# Altium PCB Universal_Driver v2___.PcbDoc (part 2 of 2)
Units mm, origin at the board's own origin, x right, y up, seen from the top; angles counter-clockwise.
Board outline 105.6 x 112.5 mm, 2 copper layers (Top Layer, Bottom Layer); 161 components, 188 nets, 675 pads, 155 vias.
Unrouted connection lines stored in the file: 74.
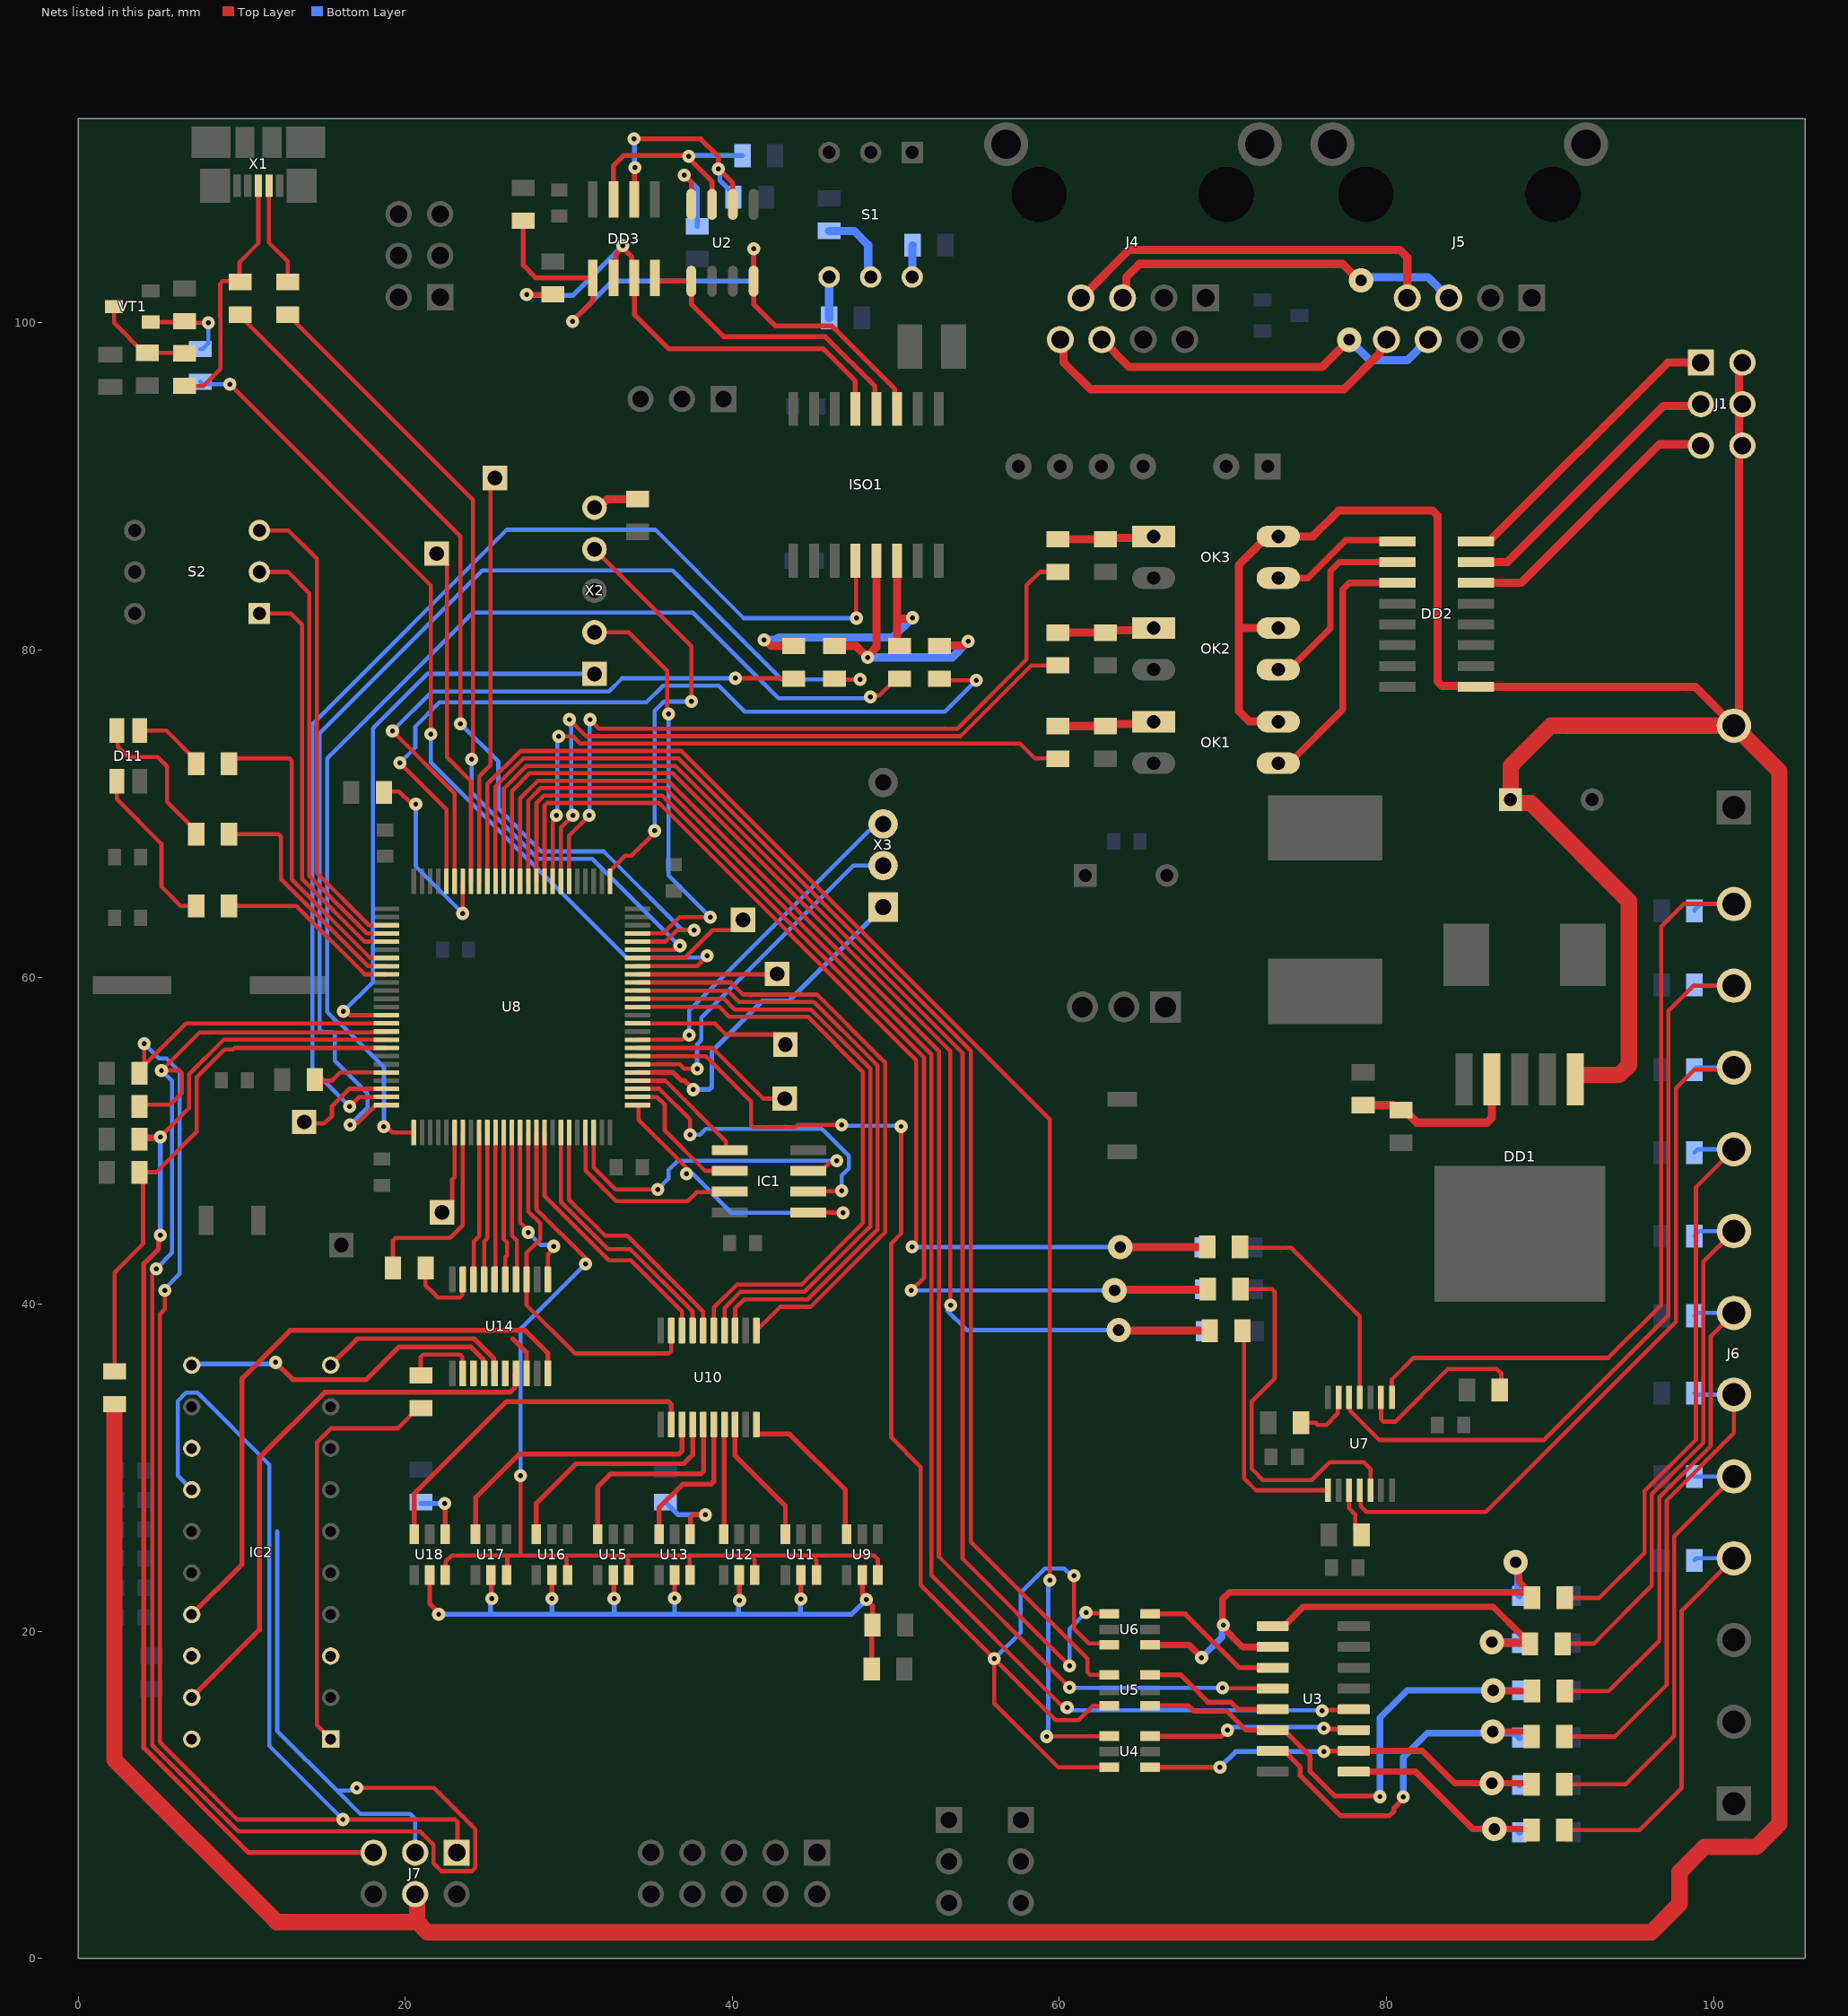
[diagram p2: the nets of this part, all layers, seen from the top]

## Via types
v1: diameter 0.8, hole 0.3, Top Layer to Bottom Layer, 122 vias
v2: diameter 1.5, hole 0.7, Top Layer to Bottom Layer, 29 vias
v3: diameter 4, hole 3.5, Top Layer to Bottom Layer, 4 vias

## Nets (pads, with @x,y where several pads share a name; then routed paths per layer and width w, separated by ;. In a path a pad name is that pad's centre, name@x,y a point inside that pad or via, vN(x,y) a via of type N, cw(c..) or ccw(c..) an arc to the next point about the centre after c; other vN are vias at no path point) (continued)
NetD5_1: D5.1 R37.2 U3.9 | length 14
  Top Layer w0.4: U3.9@78,11.43 81.77,11.43 85.275,7.925 v2(86.6,7.925) 88.8,7.925 R37.2@88.875,7.85
  Bottom Layer w0.4: v2(86.6,7.925) 87.94,7.925 D5.1@88.14,7.725
NetD6_1: D6.1 R38.2 U3.10 U4.1 | length 26.3
  Top Layer w0.3: U4.1@65.555,11.7 v1(69.825,11.7) ; v1(76.175,12.65) 76.2,12.675 77.975,12.675 U3.10@78,12.7
  Top Layer w0.4: U3.10@78,12.7 82.2,12.7 84.175,10.725 v2(86.45,10.725) 88.8,10.725 R38.2@88.875,10.65
  Bottom Layer w0.3: v1(69.825,11.7) 70.775,12.65 v1(76.175,12.65)
  Bottom Layer w0.4: v2(86.45,10.725) 88.03,10.725 D6.1@88.14,10.615
NetD7_1: D7.1 R39.2 U3.7 | length 23.3
  Top Layer w0.3: U3.7@73.05,12.7 73.735,12.7 74.73,11.705 74.73,11.196 77.201,8.725 80.175,8.725 80.458,9.008 80.458,9.2 81.025,9.767 v1(81.025,9.875)
  Top Layer w0.4: v2(86.5,13.875) 88.575,13.875 R39.2@88.875,13.575
  Bottom Layer w0.4: v1(81.025,9.875) 81.025,12.3 82.5,13.775 87.885,13.775 88.14,13.52 D7.1@88.14,13.505
NetD8_1: D8.1 R40.2 U3.6 U5.1 | length 33.3
  Top Layer w0.3: U5.1@65.555,15.45 67.897,15.45 68.223,15.125 70.25,15.125 71.405,13.97 U3.6@73.05,13.97 73.735,13.97 75.33,12.375 75.33,11.445 76.825,9.95 79.55,9.95 v1(79.6,9.9)
  Top Layer w0.4: v2(86.525,16.395) 86.57,16.35 R40.2@88.9,16.35
  Bottom Layer w0.4: v1(79.6,9.9) 79.6,14.725 81.27,16.395 v2(86.525,16.395) D8.1@88.14,16.395
NetD9_1: D9.1 R41.2 U3.1 | length 21.3
  Top Layer w0.4: U3.1@73.05,20.32 73.735,20.32 74.915,21.5 86.525,21.5 88.325,19.7 88.525,19.7 88.775,19.45 R41.2@88.775,19.25
  Top Layer w0.5: v2(86.45,19.35) 86.5,19.3 88.725,19.3 R41.2@88.775,19.25
  Bottom Layer w0.5: v2(86.45,19.35) 86.483,19.317 88.107,19.317 D9.1@88.14,19.285
NetD10_1: D10.1 R42.2 U3.2 U6.1 | length 35.1
  Top Layer w0.4: U6.1@65.555,19.175 67.925,19.175 v1(68.7,18.4) ; v1@69.975,20.275 71.2,19.05 U3.2@73.05,19.05 ; v1@69.975,20.4 69.975,21.975 70.4,22.4 88.6,22.4 R42.2@88.9,22.1 ; v2(87.9,24.225) 88.11,24.015 88.11,23.04 88.9,22.25 R42.2@88.9,22.1 ; R42.2@88.9,22.05 R42.2@88.9,22.1
  Bottom Layer w0.4: v1(68.7,18.4) 69.948,19.648 69.948,20.323 v1(70.025,20.4) ; v2(87.9,24.225) 88.02,24.105 88.02,22.295 D10.1@88.14,22.175
NetD11_2: D11.2 R49.2 | length 10.2
  Top Layer w0.254: D11.2@2.375,71.975 2.375,70.875 5.1,68.15 5.1,65.525 6.275,64.35 R49.2@7.225,64.35
NetD11_3: D11.3 R47.2 | length 4.4
  Top Layer w0.254: D11.3@3.775,75.075 5.4,75.075 7.225,73.25 R47.2@7.225,73.05
NetD11_4: D11.4 R48.2 | length 9.4
  Top Layer w0.254: D11.4@2.375,75.075 2.434,75.016 2.434,74.093 3.076,73.45 4.875,73.45 5.45,72.875 5.45,70.713 7.225,68.937 R48.2@7.225,68.738
NetD12_1: D12.1 R44.2 U8.88 | length 77.5
  Top Layer w0.254: U8.88@26.525,65.855 26.525,71.381 27.61,72.466 36.343,72.466 53.325,55.484 53.325,39.985 v1(53.356,39.954)
  Top Layer w0.5: v2(63.625,38.425) 63.652,38.399 69.173,38.399 R44.2@69.2,38.372
  Bottom Layer w0.254: v1(53.356,39.954) 53.356,39.806 53.175,39.626 53.175,39.595 54.345,38.425 v2(63.625,38.425) 68.725,38.425 D12.1@68.8,38.35
NetD13_1: D13.1 R45.2 U8.85 | length 73.4
  Top Layer w0.254: U8.85@28.025,65.855 28.025,70.643 28.486,71.104 35.713,71.104 51.727,55.09 51.727,41.627 v1(50.95,40.85)
  Top Layer w0.5: v2(63.375,40.85) 63.418,40.893 69.032,40.893 R45.2@69.075,40.936
  Bottom Layer w0.254: v1(50.95,40.85) v2(63.375,40.85) 68.676,40.85 D13.1@68.74,40.914
NetD14_1: D14.1 R46.2 U8.84 | length 68.5
  Top Layer w0.254: U8.84@28.525,65.855 28.525,70.501 28.674,70.65 35.525,70.65 51.25,54.925 51.25,43.898 51,43.648 v1(51,43.5)
  Top Layer w0.5: v2(63.725,43.5) R46.2@69.05,43.5
  Bottom Layer w0.254: v1(51,43.5) v2(63.725,43.5) 68.693,43.5 D14.1@68.715,43.478
NetDD1_4: DD1.4 R1.1 R5.1 | length 10.8
  Top Layer w0.5: R1.1@78.575,52.175 80.4,52.175 80.7,51.875 81.1,51.875 81.868,51.107 86.157,51.107 86.45,51.4 DD1.4@86.45,53.75
NetDD2_1: DD2.1 OK3.3 | length 8.3
  Top Layer w0.4: OK3.3@73.385,84.405 75.205,84.405 77.525,86.725 80.595,86.725 DD2.1@80.675,86.645
NetDD2_2: DD2.2 OK2.3 | length 12.1
  Top Layer w0.4: OK2.3@73.385,78.805 74.045,78.805 76.575,81.335 76.575,84.825 77.125,85.375 DD2.2@80.675,85.375
NetDD2_3: DD2.3 OK1.3 | length 16.2
  Top Layer w0.4: OK1.3@73.385,73.08 74.045,73.08 77.325,76.36 77.325,83.7 77.73,84.105 DD2.3@80.675,84.105
NetDD3_1: DD3.1 ISO1.11 R23.2 U2.4 | length 39.9
  Top Layer w0.3: R23.2@27.225,106.25 27.225,103.525 28,102.75 DD3.1@31.47,102.75 31.47,101.345 v1(30.225,100.1) ; v1(41.325,104.525) 41.315,104.515 41.315,102.56 U2.4@41.305,102.55 41.305,101.15 42.648,99.807 46.093,99.807 49.937,95.963 49.937,94.883 ISO1.11@50.08,94.74
  Bottom Layer w0.3: v1(30.225,100.1) 32.675,102.55 41.149,102.55 41.325,102.726 v1(41.325,104.525)
NetDD3_2: DD3.2 DD3.3 ISO1.13 R22.1 | length 32.1
  Top Layer w0.3: v1(27.426,101.726) 29.001,101.726 R22.1@29.025,101.75 ; DD3.2@32.74,102.75 32.89,102.9 32.89,104.18 33.3,104.59 33.86,104.03 33.86,102.9 DD3.3@34.01,102.75 34.01,100.515 36.1,98.425 45.55,98.425 47.525,96.45 47.525,94.755 ISO1.13@47.54,94.74
  Bottom Layer w0.3: v1(27.426,101.726) 27.477,101.675 30.25,101.675 v1(33.3,104.725)
NetDD3_4: DD3.4 ISO1.12 U2.1 | length 18.5
  Top Layer w0.3: DD3.4@35.28,102.75 35.28,102.7 35.43,102.55 U2.1@37.495,102.55 37.495,101.15 39.495,99.15 45.7,99.15 48.725,96.125 48.725,94.825 ISO1.12@48.81,94.74
NetDD3_6: DD3.6 R11.2 U2.6 | length 14.7
  Top Layer w0.3: v1(34,111.25) 38.075,111.25 39.15,110.175 v1(39.15,109.425) 40.035,108.54 U2.6@40.035,107.25 ; DD3.6@34.01,107.55 34.03,107.57 34.03,109.48 v1(34.05,109.5)
  Bottom Layer w0.3: v1(34,111.25) 34.025,111.225 34.025,109.525 v1(34.05,109.5) ; v1(39.15,109.425) 39.246,109.329 39.246,108.729 40.075,107.9 R11.2@40.075,107.7
NetDD3_7: DD3.7 R10.2 U2.7 | length 13.8
  Top Layer w0.3: DD3.7@32.74,107.55 32.74,109.615 33.375,110.25 37.264,110.25 v1(37.332,110.182) ; v1@37.4,110.25 37.496,110.154 37.496,109.919 38.765,108.65 U2.7@38.765,107.25
  Bottom Layer w0.3: v1(37.332,110.182) 37.4,110.25 40.6,110.25 R10.2@40.625,110.225
NetIC1_1: IC1.1 U8.51 | length 18.2
  Top Layer w0.254: U8.51@34.205,52.175 34.262,52.175 34.275,52.162 34.275,51.275 37.2,48.35 v1(37.2,47.975) ; IC1.1@44.65,45.62 44.66,45.61 46.765,45.61 v1(46.775,45.6)
  Bottom Layer w0.254: v1(37.2,47.975) 37.575,47.975 39.95,45.6 v1(46.775,45.6)
NetIC1_2: IC1.2 U8.53 | length 19.8
  Top Layer w0.254: U8.53@34.205,53.175 35.542,53.175 37.425,51.292 v1(37.425,50.375) ; IC1.2@44.65,46.89 44.68,46.92 46.67,46.92 v1(46.7,46.95)
  Bottom Layer w0.254: v1(37.425,50.375) 38.028,50.375 38.378,50.725 45.478,50.725 47.127,49.076 47.127,48.3 46.7,47.873 v1(46.7,46.95)
NetIC1_3: IC1.3 U8.48 | length 20.6
  Top Layer w0.254: U8.48@31.525,50.495 31.525,48.375 32.873,47.027 v1(35.45,47.027) ; IC1.3@44.65,48.16 45.45,48.16 45.961,48.671 46.296,48.671 v1(46.4,48.775)
  Bottom Layer w0.254: v1(35.45,47.027) 36.115,47.692 36.115,48.215 36.675,48.775 v1(46.4,48.775)
NetIC1_5: IC1.5 U8.54 | length 7.6
  Top Layer w0.254: U8.54@34.205,53.675 35.9,53.675 39.613,49.962 39.613,49.603 39.786,49.43 IC1.5@39.85,49.43
NetIC1_6: IC1.6 U8.52 | length 8.4
  Top Layer w0.254: U8.52@34.205,52.675 35.4,52.675 35.875,52.2 35.875,50.625 38.34,48.16 IC1.6@39.85,48.16
NetIC1_7: IC1.7 U8.47 | length 12.2
  Top Layer w0.254: U8.47@31.025,50.495 31.025,48.167 32.892,46.3 37.275,46.3 37.825,46.85 39.81,46.85 IC1.7@39.85,46.89
NetIC2_1: IC2.1 R60.1 | length 25.7
  Top Layer w0.254: IC2.1@15.45,13.415 14.593,14.272 14.593,31.55 15.457,32.413 19.538,32.413 20.775,33.65 R60.1@20.975,33.65
NetIC2_3: IC2.3 U14.13 | length 0.7
  Top Layer w0.3: U14.13@24.175,35.115 U14.13@24.175,35.78
NetIC2_10: IC2.10 U14.15 | length 12.1
  Top Layer w0.3: IC2.10@15.45,36.275 17.077,37.902 24.215,37.902 25.42,36.697 25.42,35.835 U14.15@25.475,35.78
NetIC2_11: IC2.11 U14.14 | length 20.4
  Top Layer w0.3: v1(12.075,36.45) 13.13,35.395 17.633,35.395 19.64,37.402 24.008,37.402 24.77,36.64 24.77,35.835 U14.14@24.825,35.78
  Bottom Layer w0.3: IC2.11@6.95,36.275 7.037,36.363 11.987,36.363 v1(12.075,36.45)
NetIC2_17: IC2.17 U14.20 | length 37.4
  Top Layer w0.3: IC2.17@6.95,21.035 10.031,24.116 10.031,35.467 12.966,38.402 27.338,38.402 28.725,37.015 U14.20@28.725,35.78
NetIC2_18: IC2.18 U14.18 | length 2.5
  Top Layer w0.3: 26.587,37.902 27.425,37.064 U14.18@27.425,35.78
NetIC2_19: IC2.19 U14.17 | length 34.7
  Top Layer w0.3: IC2.19@6.95,15.955 11.09,20.095 11.09,30.62 15.085,34.615 26.415,34.615 26.72,34.92 26.72,35.725 U14.17@26.775,35.78
NetIC2_20: IC2.20 U14.16 | length 0.7
  Top Layer w0.3: U14.16@26.125,35.115 U14.16@26.125,35.78
NetISO1_4: ISO1.4 U8.24 | length 70.8
  Top Layer w0.254: v1(16.6,52.1) 17.175,52.675 U8.24@18.845,52.675 ; ISO1.4@47.54,85.46 47.57,85.43 47.57,81.98 v1(47.6,81.95)
  Bottom Layer w0.254: v1(16.6,52.1) 14.321,54.379 14.321,75.471 26.2,87.35 35.3,87.35 40.7,81.95 v1(47.6,81.95)
NetISO1_5: ISO1.5 R25.2 R27.2 | length 16.9
  Top Layer w0.5: R27.2@46.25,80.25 47.575,80.25 v1(48.275,79.55) 48.275,79.631 48.81,80.166 ISO1.5@48.81,85.46 ; R25.2@52.675,80.25 52.7,80.275 54.094,80.275 54.344,80.525 v1(54.425,80.525)
  Bottom Layer w0.5: v1(48.275,79.55) 53.45,79.55 v1(54.425,80.525)
NetISO1_6: ISO1.6 R24.2 R26.1 | length 17.9
  Top Layer w0.5: v1(41.95,80.625) 42.006,80.625 42.381,80.25 R24.2@43.75,80.25 ; ISO1.6@50.08,85.46 50.08,81.83 ; R26.1@50.225,80.25 50.08,80.395 50.08,81.83 ; v1(51.025,81.975) 50.968,81.918 50.168,81.918 50.08,81.83
  Bottom Layer w0.5: v1(41.95,80.625) 42.683,80.625 42.833,80.775 49.825,80.775 v1(51.025,81.975)
NetJ4_5: J4.5 J5.5 | length 22.4
  Top Layer w0.5: J4.5@63.865,101.525 64.085,101.745 64.085,102.792 64.893,103.6 77.329,103.6 78.329,102.6 v2(78.45,102.6)
  Bottom Layer w0.5: v2(78.45,102.6) 78.721,102.6 78.921,102.8 82.54,102.8 J5.5@83.815,101.525
NetJ4_6: J4.6 J5.6 | length 22.4
  Top Layer w0.5: J4.6@62.595,98.985 64.28,97.3 76.05,97.3 v2(77.725,98.975)
  Bottom Layer w0.5: v2(77.725,98.975) 78.99,97.71 81.27,97.71 J5.6@82.545,98.985
NetJ4_7: J4.7 J5.7 | length 23.8
  Top Layer w0.5: J4.7@61.325,101.525 64.275,104.475 80.8,104.475 81.275,104 J5.7@81.275,101.525
NetJ4_8: J4.8 J5.8 | length 23.4
  Top Layer w0.5: J4.8@60.055,98.985 60.25,98.79 60.25,97.6 61.9,95.95 77.4,95.95 79.606,98.156 79.606,98.275 80.005,98.674 J5.8@80.005,98.985
NetJ6_4: J6.4 R28.1 R37.1 | length 26.1
  Top Layer w0.254: R37.1@90.875,7.85 95.475,7.85 98.05,10.425 98.05,21.275 J6.4@101.25,24.475
  Bottom Layer w0.254: R28.1@98.825,24.35 98.95,24.475 J6.4@101.25,24.475
NetJ6_5: J6.5 R29.1 R38.1 | length 27.7
  Top Layer w0.254: R38.1@90.875,10.65 94.625,10.65 97.596,13.621 97.596,25.821 J6.5@101.25,29.475
  Bottom Layer w0.254: R29.1@98.825,29.475 J6.5@101.25,29.475
NetJ6_6: J6.6 R30.1 R39.1 | length 29.5
  Top Layer w0.254: R39.1@90.875,13.575 93.975,13.575 97.142,16.742 97.142,28.016 101.25,32.124 J6.6@101.25,34.475
  Bottom Layer w0.254: R30.1@98.825,34.575 98.925,34.475 J6.6@101.25,34.475
NetJ6_7: J6.7 R31.1 R40.1 | length 31.5
  Top Layer w0.254: R40.1@90.9,16.35 93.6,16.35 96.688,19.438 96.688,28.204 99.833,31.349 99.833,38.058 J6.7@101.25,39.475
  Bottom Layer w0.254: R31.1@98.825,39.3 99,39.475 J6.7@101.25,39.475
NetJ6_8: J6.8 R32.1 R41.1 | length 33.2
  Top Layer w0.254: R41.1@90.775,19.25 92.692,19.25 96.234,22.792 96.234,28.392 99.379,31.537 99.379,42.604 J6.8@101.25,44.475
  Bottom Layer w0.254: R32.1@98.825,44.175 99.125,44.475 J6.8@101.25,44.475
NetJ6_9: J6.9 R33.1 R42.1 | length 35.5
  Top Layer w0.254: R42.1@90.9,22.05 93.025,22.05 95.78,24.805 95.78,28.58 98.925,31.725 98.925,47.15 J6.9@101.25,49.475
  Bottom Layer w0.254: R33.1@98.825,49.275 99.025,49.475 J6.9@101.25,49.475
NetJ6_10: J6.10 R34.1 U7.11 | length 46.1
  Top Layer w0.254: U7.11@78.375,28.63 78.426,28.579 78.426,27.649 78.775,27.3 86.075,27.3 97.7,38.925 97.7,53.225 98.825,54.35 101.125,54.35 J6.10@101.25,54.475
  Bottom Layer w0.254: R34.1@98.825,54.35 98.95,54.475 J6.10@101.25,54.475
NetJ6_11: J6.11 R35.1 U7.5 | length 49.9
  Top Layer w0.254: U7.5@77.715,34.32 77.765,34.269 77.765,33.5 79.566,31.7 89.625,31.7 97.246,39.321 97.246,57.946 98.775,59.475 J6.11@101.25,59.475
  Bottom Layer w0.254: R35.1@98.825,59.525 98.875,59.475 J6.11@101.25,59.475
NetJ6_12: J6.12 R36.1 U7.1 | length 50.2
  Top Layer w0.254: U7.1@80.331,34.32 80.331,35.406 81.65,36.725 93.575,36.725 96.792,39.942 96.792,63.092 98.175,64.475 J6.12@101.25,64.475
  Bottom Layer w0.254: R36.1@98.825,64.05 98.825,64.102 99.198,64.475 J6.12@101.25,64.475
NetOK1_1: OK1.1 R7.2 R8.1 | length 6
  Top Layer w0.5: R7.2@59.9,75.35 R8.1@62.825,75.35 62.96,75.485 65.63,75.485 OK1.1@65.765,75.62
NetOK2_1: OK2.1 R13.2 R14.1 | length 6
  Top Layer w0.5: R13.2@59.9,81.063 R14.1@62.825,81.062 62.966,81.204 65.624,81.204 OK2.1@65.765,81.345
NetOK3_1: OK3.1 R17.2 R18.1 | length 5.9
  Top Layer w0.5: R17.2@59.9,86.775 R18.1@62.825,86.775 62.91,86.86 65.68,86.86 OK3.1@65.765,86.945
NetR3_1: R3.1 S1.1B | length 2
  Bottom Layer w0.5: S1.1B@51.005,102.805 51.015,102.815 51.015,104.74 R3.1@51.025,104.75
NetR4_1: R4.1 S1.3B | length 2.5
  Bottom Layer w0.5: R4.1@45.925,100.3 S1.3B@45.925,102.805
NetR6_2: R6.2 U2.8 | length 5.4
  Top Layer w0.3: v1(37.075,109.025) 37.495,108.605 U2.8@37.495,107.25
  Bottom Layer w0.3: v1(37.075,109.025) 37.85,108.25 R6.2@37.85,105.9
NetR9_1: R9.1 S1.2B | length 4.8
  Bottom Layer w0.5: R9.1@45.925,105.625 47.45,105.625 48.31,104.765 48.31,102.96 S1.2B@48.465,102.805
NetR12_2: R12.2 X1.2 | length 6.4
  Top Layer w0.254: X1.2@11.675,108.39 11.675,104.905 12.825,103.755 R12.2@12.825,102.5
NetR15_2: R15.2 R16.1 X1.3 | length 15.4
  Top Layer w0.254: R16.1@6.5,96.15 7.675,96.15 8.702,97.177 8.702,100.301 8.695,100.308 8.695,102.401 8.844,102.55 9.875,102.55 9.875,103.725 11.025,104.875 X1.3@11.025,108.39
NetR16_2: R16.2 R20.2 VT1.3 | length 6.1
  Top Layer w0.254: VT1.3@2.2,101 2.2,100 4.025,98.175 R20.2@4.225,98.175 6.475,98.175 R16.2@6.5,98.15
NetR19_1: R19.1 R21.2 VT1.1 | length 5.5
  Top Layer w0.254: VT1.1@4.45,100.05 6.45,100.05 R19.1@6.5,100.1 6.6,100 v1(7.975,100)
  Bottom Layer w0.254: R21.2@7.475,98.4 7.602,98.4 7.975,98.773 v1(7.975,100)
NetR24_1: R24.1 U8.95 | length 36.7
  Top Layer w0.254: v1(19.225,75.05) 23.025,71.25 U8.95@23.025,65.855 ; v1(40.2,78.275) 43.497,78.275 43.636,78.136 R24.1@43.75,78.25
  Bottom Layer w0.254: v1(19.225,75.05) 21.643,77.468 32.46,77.468 33.267,78.275 v1(40.2,78.275)
NetR25_1: R25.1 U8.96 | length 50.1
  Top Layer w0.254: v1(19.675,73.1) 22.525,70.25 U8.96@22.525,65.855 ; R25.1@52.675,78.25 52.775,78.15 v1(54.925,78.15)
  Bottom Layer w0.254: v1(19.675,73.1) 20.623,74.048 20.623,75.323 22.096,76.796 34.746,76.796 35.771,77.821 39.179,77.821 40.775,76.225 53,76.225 v1(54.925,78.15)
NetR26_2: R26.2 U8.26 | length 67.4
  Top Layer w0.254: v1(18.7,50.85) 18.848,50.85 19.203,50.495 U8.26@20.525,50.495 ; v1(48.45,77.125) 48.554,77.229 49.004,77.229 50.025,78.25 R26.2@50.225,78.25
  Bottom Layer w0.254: v1(18.7,50.85) 18.7,54.5 16.025,57.175 15.924,57.175 15.229,57.87 15.229,73.379 24.15,82.3 25.05,82.3 37.575,82.3 42.825,77.05 48.375,77.05 v1(48.45,77.125)
NetR27_1: R27.1 U8.25 | length 70.2
  Top Layer w0.254: v1(16.625,50.975) 16.729,51.079 17.109,51.079 18.205,52.175 U8.25@18.845,52.175 ; R27.1@46.25,78.25 46.3,78.2 v1(47.825,78.2)
  Bottom Layer w0.254: v1(16.625,50.975) 17.7,52.05 17.7,52.9 15.704,54.896 15.704,56.501 15.555,56.65 14.924,56.65 14.775,56.799 14.775,74.925 24.725,84.875 36.35,84.875 43.025,78.2 v1(47.825,78.2)
NetR43_1: R43.1 U8.94 | length 12.1
  Top Layer w0.254: R43.1@18.7,71.3 18.75,71.35 19.633,71.35 20.303,70.679 20.546,70.679 v1(20.65,70.575) ; v1(23.525,63.9) U8.94@23.525,65.855
  Bottom Layer w0.254: v1(20.65,70.575) 20.65,66.775 v1(23.525,63.9)
NetR44_1: R44.1 U7.8 | length 14.5
  Top Layer w0.254: R44.1@71.2,38.372 71.3,38.272 71.3,29.35 72.02,28.63 U7.8@76.419,28.63
NetR45_1: R45.1 U7.12 | length 23.1
  Top Layer w0.254: R45.1@71.075,40.936 72.989,40.936 73.175,40.75 73.175,35.471 71.754,34.05 71.754,29.946 72.45,29.25 75.425,29.25 76.525,30.35 78.625,30.35 79.035,29.94 U7.12@79.035,28.63
NetR46_1: R46.1 U7.4 | length 14
  Top Layer w0.254: R46.1@71.05,43.5 71.1,43.45 74.175,43.45 78.375,39.25 U7.4@78.375,34.32
NetR47_1: R47.1 U8.7 | length 19.1
  Top Layer w0.254: R47.1@9.225,73.05 9.55,73.375 12.926,73.375 13.075,73.226 13.075,65.967 17.854,61.188 18.832,61.188 U8.7@18.845,61.175
NetR48_1: R48.1 U8.8 | length 14.5
  Top Layer w0.254: R48.1@9.225,68.738 12.237,68.738 12.4,68.575 12.4,66 17.725,60.675 U8.8@18.845,60.675
NetR49_1: R49.1 U8.9 | length 11.3
  Top Layer w0.254: R49.1@9.225,64.35 13.35,64.35 17.525,60.175 U8.9@18.845,60.175
NetR50_2: R50.2 U7.2 | length 11.3
  Top Layer w0.254: U7.2@79.67,34.32 79.67,32.974 79.819,32.825 80.533,32.825 83.758,36.05 86.725,36.05 87.025,35.75 87.025,34.85 R50.2@86.925,34.75
NetR51_2: R51.2 U7.6 | length 3.6
  Top Layer w0.254: R51.2@74.775,32.75 75.679,32.75 75.799,32.63 76.33,32.63 77.029,33.329 77.029,34.269 U7.6@77.08,34.32
NetR52_2: R52.2 U7.10 | length 3
  Top Layer w0.254: U7.10@77.715,28.63 77.715,27.535 78.102,27.148 78.102,26.273 R52.2@78.475,25.9
NetR57_1: R57.1 U8.21 | length 4.6
  Top Layer w0.254: R57.1@14.475,53.75 14.55,53.675 15.525,53.675 16.025,54.175 U8.21@18.845,54.175
NetR58_2: R58.2 U13.1 | length 4.7
  Top Layer w0.3: U13.1@37.425,25.95 37.437,25.962 37.437,26.949 37.613,27.125 v1(38.35,27.125)
  Bottom Layer w0.3: R58.2@35.925,27.9 36.7,27.125 v1(38.35,27.125)
NetR59_1: R59.1 U14.9 | length 4.7
  Top Layer w0.254: R59.1@21.25,42.225 21.25,41.15 21.724,40.676 21.992,40.408 23.34,40.408 23.493,40.561 23.493,41.488 U14.9@23.525,41.52
NetR59_2: R59.2 U8.32 | length 12
  Top Layer w0.254: R59.2@19.25,42.225 19.25,43.901 19.399,44.05 22.737,44.05 23.525,44.838 U8.32@23.525,50.495
NetR60_2: R60.2 U14.12 | length 4.8
  Top Layer w0.254: R60.2@20.975,35.65 20.95,35.675 20.95,36.776 21.099,36.925 23.343,36.925 23.491,36.776 23.491,35.814 U14.12@23.525,35.78
NetR62_2: R62.2 U18.1 | length 3.3
  Top Layer w0.3: v1(22.425,27.825) 22.438,27.812 22.438,25.962 U18.1@22.45,25.95
  Bottom Layer w0.3: R62.2@20.975,27.825 v1(22.425,27.825)
NetR63_2: R63.2 X2.5 | length 2.8
  Top Layer w0.5: X2.5@31.575,88.705 31.846,88.705 32.366,89.225 R63.2@34.2,89.225
NetR64_2: R64.2 R65.2 U9.5 U11.5 U12.5 U13.5 U15.5 U16.5 U17.5 U18.5 | length 49.7
  Top Layer w0.3: U18.5@21.5,23.44 21.5,21.702 22.05,21.152 v1(22.05,21.05) ; U17.5@25.25,23.44 25.275,23.415 25.275,22.025 v1(25.3,22) ; v1(28.975,22) U16.5@28.975,23.44 ; U15.5@32.725,23.44 32.75,23.415 32.75,22.025 v1(32.775,22) ; v1(36.475,22.025) U13.5@36.475,23.44 ; U12.5@40.425,23.44 40.438,23.427 40.438,21.912 v1(40.45,21.9) ; v1(44.2,21.975) U11.5@44.2,23.44 ; U9.5@47.95,23.44 47.95,22.335 48.2,22.085 v1(48.2,21.95) 48.2,21.918 48.575,21.543 R65.2@48.575,20.4 48.525,20.35 R64.2@48.525,17.7
  Bottom Layer w0.3: v1(22.05,21.05) 25.225,21.05 ; v1(25.3,22) 25.225,21.925 25.225,21.05 ; v1(28.975,22) 28.975,21.15 28.875,21.05 ; v1(32.775,22) 32.775,21.15 32.675,21.05 ; v1(36.475,22.025) 36.475,21.15 36.375,21.05 ; v1(40.45,21.9) 40.375,21.825 40.375,21.05 ; v1(44.2,21.975) 44.175,21.95 44.175,21.05 ; v1(48.2,21.95) 47.3,21.05 44.175,21.05 ; 25.225,21.05 28.875,21.05 ; 28.875,21.05 32.675,21.05 ; 32.675,21.05 36.375,21.05 ; 36.375,21.05 40.375,21.05 ; 40.375,21.05 44.175,21.05
NetS2_1A: S2.1A U8.5 | length 25.2
  Top Layer w0.254: S2.1A@11.085,82.235 13.015,82.235 13.69,81.56 13.69,65.994 17.509,62.175 U8.5@18.845,62.175
NetS2_2A: S2.2A U8.4 | length 27
  Top Layer w0.254: S2.2A@11.085,84.775 12.85,84.775 14.144,83.481 14.144,66.182 17.651,62.675 U8.4@18.845,62.675
NetS2_3A: S2.3A U8.3 | length 29
  Top Layer w0.254: S2.3A@11.085,87.315 12.86,87.315 14.598,85.577 14.598,66.37 17.793,63.175 U8.3@18.845,63.175
NetTP1_1: TP1.1 U8.93 | length 20.9
  Top Layer w0.254: TP1.1@21.925,85.9 22.548,85.277 22.548,73.452 24.025,71.975 U8.93@24.025,65.855
NetTP2_1: TP2.1 U8.92 | length 25.1
  Top Layer w0.254: U8.92@24.525,65.855 24.525,72.275 25.225,72.975 25.225,90.25 TP2.1@25.5,90.525
NetTP3_1: TP3.1 U8.31 | length 5.2
  Top Layer w0.254: TP3.1@22.25,45.625 22.873,46.248 22.873,47.62 23.025,47.772 U8.31@23.025,50.495
NetTP5_1: TP5.1 U8.69 | length 7.4
  Top Layer w0.254: U8.69@34.205,61.175 37.081,61.175 38.783,62.877 40.027,62.877 TP5.1@40.65,63.5
NetTP6_1: TP6.1 U8.67 | length 8.6
  Top Layer w0.254: U8.67@34.205,60.175 42.725,60.175 TP6.1@42.75,60.2
NetTP7_1: TP7.1 U8.61 | length 9.6
  Top Layer w0.254: U8.61@34.205,57.175 38.925,57.175 39.602,56.498 42.627,56.498 TP7.1@43.25,55.875
NetTP8_1: TP8.1 U8.58 | length 10.3
  Top Layer w0.254: U8.58@34.205,55.675 38.8,55.675 41.9,52.575 TP8.1@43.2,52.575
NetTP9_1: TP9.1 U8.23 | length 6.3
  Top Layer w0.254: TP9.1@13.825,51.15 13.925,51.05 15.05,51.05 15.525,51.525 15.525,52.125 16.575,53.175 U8.23@18.845,53.175
NetU3_3: U3.3 U6.3 | length 8.9
  Top Layer w0.3: U6.3@65.555,21.075 67.7,21.075 70.995,17.78 U3.3@73.05,17.78
NetU3_4: U3.4 U8.87 | length 92.6
  Top Layer w0.254: U8.87@27.025,65.855 27.025,70.927 28.11,72.012 36.089,72.012 52.635,55.466 52.635,40.261 52.629,40.255 52.629,24.571 v1(60.625,16.575) ; v1(69.974,16.55) 69.994,16.53 73.03,16.53 U3.4@73.05,16.51
  Bottom Layer w0.254: v1(60.625,16.575) 60.65,16.55 v1(69.974,16.55)
NetU3_5: U3.5 U5.3 | length 8.4
  Top Layer w0.3: U5.3@65.555,17.35 67.4,17.35 69.075,15.675 70.478,15.675 70.913,15.24 U3.5@73.05,15.24
NetU3_11: U3.11 U4.3 | length 12.7
  Top Layer w0.3: U4.3@65.555,13.6 69.925,13.6 v1(70.284,13.959) ; v1(76.175,14.075) 76.227,14.023 77.947,14.023 U3.11@78,13.97
  Bottom Layer w0.3: v1(70.284,13.959) 70.42,13.959 70.61,14.15 76.1,14.15 v1(76.175,14.075)
NetU3_12: U3.12 U8.86 | length 97.8
  Top Layer w0.254: U8.86@27.525,65.855 27.525,70.785 28.298,71.558 35.901,71.558 52.181,55.278 52.181,40.449 52.175,40.443 52.175,23.425 60.064,15.536 60.141,15.536 60.327,15.35 v1(60.475,15.35) ; v1(76.075,15.15) 76.12,15.195 77.955,15.195 U3.12@78,15.24
  Bottom Layer w0.254: v1(60.475,15.35) 60.65,15.175 76.05,15.175 v1(76.075,15.15)
NetU4_4: U4.4 U8.91 | length 92.2
  Top Layer w0.254: U8.91@25.025,65.855 25.025,71.808 27.045,73.828 36.907,73.828 59.425,51.31 v1(59.425,23.125) ; v1(59.225,13.575) 59.238,13.588 63.033,13.588 U4.4@63.045,13.6
  Bottom Layer w0.254: v1(59.225,13.575) 59.325,13.675 59.325,23.025 v1(59.425,23.125)
NetU5_4: U5.4 U8.90 | length 85.3
  Top Layer w0.254: U8.90@25.525,65.855 25.525,71.665 27.234,73.374 36.719,73.374 54.596,55.497 54.596,25.454 61.725,18.325 61.725,17.499 61.874,17.35 U5.4@63.045,17.35
NetU6_4: U6.4 U8.89 | length 86.9
  Top Layer w0.254: U8.89@26.025,65.855 26.025,71.523 27.422,72.92 36.531,72.92 54.083,55.368 54.083,24.442 v1(60.625,17.9) ; v1(61.627,21.15) 61.664,21.113 63.007,21.113 U6.4@63.045,21.075
  Bottom Layer w0.254: v1(60.625,17.9) 60.625,20.15 61.625,21.15 v1(61.627,21.15)
NetU8_34: U8.34 U14.8 | length 9.1
  Top Layer w0.254: U14.8@24.175,41.52 24.2,41.545 24.2,43.85 24.525,44.175 U8.34@24.525,50.495
NetU8_35: U8.35 U14.7 | length 9.1
  Top Layer w0.254: U14.7@24.825,41.52 24.825,43.833 25.025,44.033 U8.35@25.025,50.495
NetU8_36: U8.36 U14.6 | length 9
  Top Layer w0.254: U14.6@25.475,41.52 25.525,41.57 U8.36@25.525,50.495
NetU8_37: U8.37 U14.5 | length 9.1
  Top Layer w0.254: U8.37@26.025,50.495 26.025,43.975 26.225,43.775 26.225,42.987 26.125,42.887 U14.5@26.125,41.52
NetU8_38: U8.38 U14.4 | length 9.1
  Top Layer w0.254: U8.38@26.525,50.495 26.525,44.2 26.825,43.9 26.825,41.57 U14.4@26.775,41.52
NetU8_39: U8.39 U14.1 | length 10.4
  Top Layer w0.254: U8.39@27.025,50.495 27.025,45.004 27.525,44.504 v1(27.525,44.4) ; U14.1@28.725,41.52 28.725,43.052 29.075,43.402 v1(29.075,43.55)
  Bottom Layer w0.254: v1(27.525,44.4) 28.294,43.631 28.994,43.631 v1(29.075,43.55)
NetU8_40: U8.40 U10.9 U14.3 | length 22.6
  Top Layer w0.254: U8.40@27.525,50.495 27.525,45.683 28.252,44.956 28.252,43.98 27.425,43.153 27.425,39.95 30.375,37 36.126,37 36.275,37.149 U10.9@36.275,38.395
NetU8_42: U8.42 U10.8 | length 16.4
  Top Layer w0.254: U8.42@28.525,50.495 28.525,46.613 32.458,42.679 33.807,42.679 36.925,39.561 U10.8@36.925,38.395
NetU8_44: U8.44 U10.7 | length 16.2
  Top Layer w0.254: U8.44@29.525,50.495 29.525,46.255 32.405,43.375 33.761,43.375 37.575,39.561 U10.7@37.575,38.395
NetU8_45: U8.45 U10.6 | length 16.3
  Top Layer w0.254: U8.45@30.025,50.495 30.025,46.397 32.223,44.198 33.58,44.198 38.225,39.553 U10.6@38.225,38.395
NetU8_55: U8.55 X3.1 | length 21.3
  Top Layer w0.3: U8.55@34.205,54.175 36.382,54.175 36.859,53.698 37.052,53.698 v1(37.625,53.125)
  Bottom Layer w0.3: v1(37.625,53.125) 38.576,53.125 38.752,53.301 38.752,55.452 41.841,58.541 43.481,58.541 48.475,63.535 X3.1@49.225,64.285
NetU8_56: U8.56 X3.2 | length 22
  Top Layer w0.254: U8.56@34.205,54.675 36.795,54.675 37.07,54.4 v1(37.85,54.4)
  Bottom Layer w0.254: v1(37.85,54.4) 37.85,55.895 38.102,56.147 38.102,57.514 47.413,66.825 X3.2@49.225,66.825
NetU8_59: U8.59 X3.3 | length 21.4
  Top Layer w0.254: U8.59@34.205,56.175 36.954,56.175 37.227,56.448 v1(37.375,56.448)
  Bottom Layer w0.254: v1(37.375,56.448) 37.375,57.975 48.343,68.943 48.385,68.943 48.807,69.365 X3.3@49.225,69.365
NetU8_63: U8.63 U10.5 | length 37.3
  Top Layer w0.254: U8.63@34.205,58.175 39.217,58.175 39.817,57.575 44.624,57.575 47.988,54.211 47.988,44.964 44.236,41.212 40.287,41.212 38.875,39.8 U10.5@38.875,38.395
NetU8_64: U8.64 U10.4 | length 38
  Top Layer w0.254: U8.64@34.205,58.675 39.5,58.675 40.146,58.029 44.812,58.029 48.067,54.774 48.442,54.399 48.442,44.776 48.067,44.401 44.424,40.758 40.508,40.758 39.525,39.775 U10.4@39.525,38.395
NetU8_65: U8.65 U10.3 | length 38.7
  Top Layer w0.254: U8.65@34.205,59.175 39.725,59.175 40.417,58.483 45,58.483 48.521,54.962 48.896,54.587 48.896,44.588 48.521,44.213 44.612,40.304 40.729,40.304 40.175,39.75 U10.3@40.175,38.395
NetU8_66: U8.66 U10.1 | length 37.9
  Top Layer w0.254: U8.66@34.205,59.675 39.929,59.675 40.667,58.937 45.188,58.937 48.975,55.15 49.35,54.775 49.35,44.4 48.975,44.025 44.8,39.85 42.93,39.85 U10.1@41.475,38.395
NetU8_72: U8.72 X2.2 | length 26.4
  Top Layer w0.254: X2.2@31.575,81.085 33.665,81.085 36.032,78.718 36.032,76.168 v1(36.1,76.1) ; U8.72@34.205,62.675 35.775,62.675 36.775,63.675 v1(38.65,63.675)
  Bottom Layer w0.254: v1(36.1,76.1) 36.1,66.225 v1(38.65,63.675)
NetU8_76: U8.76 X2.4 | length 26
  Top Layer w0.254: X2.4@31.575,86.165 37.5,80.24 v1(37.5,76.85) ; U8.76@32.525,65.855 32.525,66.495 33.451,67.421 33.838,67.421 35.25,68.833 v1(35.25,68.95)
  Bottom Layer w0.254: v1(35.25,68.95) 35.25,76.278 35.822,76.85 v1(37.5,76.85)
NetU9_3: U9.3 U10.20 | length 10.1
  Top Layer w0.3: U10.20@41.475,32.655 41.475,32.126 41.53,32.071 43.504,32.071 46.9,28.675 46.9,26.05 U9.3@47,25.95
NetU10_12: U10.12 U18.3 | length 21.8
  Top Layer w0.3: U18.3@20.55,25.95 20.55,28.4 26.2,34.05 31.149,34.05 ; 31.15,34.051 36.099,34.051 36.275,33.875 U10.12@36.275,32.655
NetU10_13: U10.13 U17.3 | length 17.7
  Top Layer w0.3: U17.3@24.3,25.95 24.3,28.175 26.975,30.85 36.749,30.85 36.925,31.026 U10.13@36.925,32.655
NetU10_14: U10.14 U16.3 | length 14.5
  Top Layer w0.3: U16.3@28.025,25.95 28.025,27.825 30.45,30.25 37.025,30.25 37.575,30.8 U10.14@37.575,32.655
NetU10_15: U10.15 U15.3 | length 12.6
  Top Layer w0.3: U15.3@31.775,25.95 31.775,28.85 32.55,29.625 38.074,29.625 38.25,29.801 38.25,32.63 U10.15@38.225,32.655
NetU10_16: U10.16 U13.3 | length 9.1
  Top Layer w0.3: U13.3@35.525,25.95 35.525,27.55 36.975,29 38.699,29 38.875,29.176 U10.16@38.875,32.655
NetU10_17: U10.17 U12.3 | length 6.7
  Top Layer w0.3: U12.3@39.475,25.95 39.5,25.975 39.5,32.63 U10.17@39.525,32.655
NetU10_18: U10.18 U11.3 | length 8
  Top Layer w0.3: U10.18@40.175,32.655 40.175,30.75 43.25,27.675 U11.3@43.25,25.95
R1: R17.1 U8.81 | length 45.9
  Top Layer w0.254: U8.81@30.025,65.855 30.025,68.649 31.252,69.876 v1(31.252,69.903) ; v1(31.3,75.75) 31.86,75.19 53.765,75.19 58,79.425 58,83.956 58.819,84.775 R17.1@59.9,84.775
  Bottom Layer w0.254: v1(31.252,69.903) 31.276,69.927 31.276,75.726 v1(31.3,75.75)
R2: R13.1 U8.82 | length 42.3
  Top Layer w0.254: U8.82@29.525,65.855 29.525,69.145 30.252,69.872 v1(30.252,69.904) ; v1(30.05,75.75) 31.064,74.736 53.953,74.736 58.28,79.063 R13.1@59.9,79.063
  Bottom Layer w0.254: v1(30.05,75.75) 30.151,75.649 30.151,70.005 v1(30.252,69.904)
R3: R7.1 U8.83 | length 40.1
  Top Layer w0.254: U8.83@29.025,65.855 29.025,69.527 29.252,69.754 v1(29.252,69.902) ; v1(29.375,74.725) 30.255,74.725 30.698,74.282 57.593,74.282 58.5,73.375 59.875,73.375 R7.1@59.9,73.35
  Bottom Layer w0.254: v1(29.252,69.902) 29.314,69.964 29.314,74.664 v1(29.375,74.725)
RELE1: DD2.16 J1.1 | length 18.3
  Top Layer w0.5: DD2.16@85.475,86.645 86.275,86.645 97.205,97.575 J1.1@99.225,97.575
RELE2: DD2.15 J1.3 | length 17.8
  Top Layer w0.5: DD2.15@85.475,85.375 87.4,85.375 96.95,94.925 99.115,94.925 J1.3@99.225,95.035
RELE3: DD2.14 J1.5 | length 17.3
  Top Layer w0.5: DD2.14@85.475,84.105 88.23,84.105 96.7,92.575 99.145,92.575 J1.5@99.225,92.495
RESET: U8.14 X2.1 | length 35.7
  Top Layer w0.254: v1(16.225,57.902) 16.373,57.902 16.6,57.675 U8.14@18.845,57.675
  Bottom Layer w0.254: v1(16.225,57.902) 18.025,59.702 18.025,75.225 21.345,78.545 27.87,78.545 X2.1@31.575,78.545
sensI_1: IC2.14 J7.1 R55.1 U8.15 | length 121.2
  Top Layer w0.254: R55.1@3.75,54.125 4.123,54.498 R55.1@4.123,54.698 ; v1(4.049,55.926) 4.049,54.698 R55.1@4.123,54.698 ; v1(5.3,40.85) 5.3,39.693 5,39.393 5,13.225 9.725,8.5 23.051,8.5 23.2,8.351 23.2,6.525 J7.1@23.15,6.475 ; U8.15@18.845,57.175 6.6,57.175 R55.1@4.123,54.698
  Bottom Layer w0.254: v1(4.049,55.926) 4.948,55.027 5.401,55.027 6.206,54.222 6.206,41.854 5.3,40.948 v1(5.3,40.85) ; IC2.14@6.95,28.655 6.093,29.512 6.093,34.09 6.595,34.592 7.305,34.592 11.7,30.197 11.7,13 v1(16.2,8.5)
sensI_2: IC2.13 J7.3 R54.1 U8.16 | length 122.8
  Top Layer w0.254: R54.1@3.75,52.1 3.85,52.2 5.625,52.2 6.342,52.917 6.342,54.151 6.193,54.3 v1(5.1,54.3) 7.429,56.629 17.937,56.629 17.95,56.642 18.092,56.642 18.112,56.662 18.832,56.662 U8.16@18.845,56.675 ; v1(4.775,42.175) 4.775,42.027 4.546,41.798 4.546,13.037 9.81,7.773 20.909,7.773 21.739,6.943 21.739,5.818 22.212,5.346 24.088,5.346 24.279,5.537 24.279,7.914 21.768,10.425 v1(17.05,10.425)
  Bottom Layer w0.254: v1(4.775,42.175) 5.752,43.152 5.752,53.648 v1(5.1,54.3) ; 12.154,26.127 12.172,26.109 12.172,13.928 15.837,10.263 ; v1(17.05,10.425) 16.946,10.321 16.686,10.321 16.628,10.263 15.837,10.263 ; J7.3@20.61,6.475 20.61,8.54 20.3,8.85 17.25,8.85 15.837,10.263
sensV_24v: R2.1 R56.1 U8.18 | length 33.2
  Top Layer w0.254: R2.1@2.225,35.9 2.225,41.95 3.975,43.7 3.975,47.85 R56.1@3.75,48.075 4.775,48.075 7.25,50.55 7.25,53.87 8.955,55.575 9.459,55.575 9.559,55.675 U8.18@18.845,55.675
sensV_PWR: J7.5 R53.1 U8.17 | length 74.1
  Top Layer w0.254: R53.1@3.75,50.1 3.875,50.1 v1@4.675,50.1 ; v1@5.079,50.281 6.796,51.998 6.796,54.058 8.913,56.175 U8.17@18.845,56.175
  Top Layer w0.3: R53.1@3.75,50.1 3.875,50.225 4.675,50.225 4.912,50.225 v1(5.023,50.225) ; v1(5.025,44.225) 4.929,44.129 4.929,43.39 4.025,42.486 4.025,12.883 10.433,6.475 J7.5@18.07,6.475
  Bottom Layer w0.3: v1(5.023,50.225) 5.024,50.224 5.024,44.226 v1(5.025,44.225)
SW_Diff_Singl: U4.6 U5.6 U6.6 U8.57 | length 89.1
  Top Layer w0.254: U8.57@34.205,55.175 38.375,55.175 41.15,52.4 41.15,50.974 41.299,50.825 43.851,50.825 44.001,50.975 v1(46.7,50.975) ; v1(50.325,50.875) 50.325,44.325 49.725,43.725 49.725,31.85 51.525,30.05 51.525,22.825 v1(56.025,18.325) ; v1(60.9,23.4) 60.9,20.175 61.8,19.275 62.945,19.275 U6.6@63.045,19.175 ; U4.6@63.045,11.7 59.925,11.7 56.025,15.6 v1(56.025,18.325) ; U5.6@63.045,15.45 62.05,15.45 61.175,14.575 59.775,14.575 v1(56.025,18.325)
  Bottom Layer w0.254: v1(46.7,50.975) 46.75,50.925 50.275,50.925 v1(50.325,50.875) ; v1(56.025,18.325) 57.627,19.927 57.627,22.355 59.124,23.852 60.3,23.852 60.752,23.4 v1(60.9,23.4)
SW_s_h: U8.41 U9.6 U11.6 U12.6 U13.6 U15.6 U16.6 U17.6 U18.6 | length 65.1
  Top Layer w0.254: U18.6@22.45,23.44 22.477,23.467 22.477,24.277 22.85,24.65 26,24.65 26.245,24.65 ; U17.6@26.2,23.44 26.245,23.485 26.245,24.65 ; v1(27.05,29.525) 27.05,24.65 ; U8.41@28.025,50.495 28.025,45.825 31.025,42.825 v1(31.025,42.475) ; U16.6@29.925,23.44 29.875,23.49 29.875,24.4 29.625,24.65 ; U15.6@33.675,23.44 33.625,23.49 33.625,24.4 33.375,24.65 ; U13.6@37.425,23.44 37.4,23.465 37.4,24.425 37.175,24.65 ; U12.6@41.375,23.44 41.375,24.375 41.1,24.65 ; U11.6@45.15,23.44 45.15,24.35 44.85,24.65 ; U9.6@48.9,23.44 48.9,24.425 48.675,24.65 44.85,24.65 ; 26.245,24.65 27.05,24.65 ; 27.05,24.65 29.625,24.65 ; 29.625,24.65 33.375,24.65 ; 33.375,24.65 37.175,24.65 ; 37.175,24.65 41.1,24.65 ; 41.1,24.65 44.85,24.65
  Bottom Layer w0.254: v1(27.05,29.525) 27.05,38.5 v1(31.025,42.475)
USB_DM: R12.1 U8.70 | length 53.2
  Top Layer w0.254: R12.1@12.825,100.5 24.15,89.175 24.15,73.436 24.075,73.361 v1(24.075,73.328) ; U8.70@34.205,61.675 36.502,61.675 36.729,61.902 36.78,61.902 v1(36.803,61.925)
  Bottom Layer w0.254: v1(24.075,73.328) 24.075,71.283 28.124,67.234 31.449,67.234 36,62.682 36.757,61.925 v1(36.803,61.925)
USB_DP: R15.1 U8.71 | length 55.6
  Top Layer w0.254: R15.1@9.925,100.5 9.875,100.45 23.375,86.95 v1(23.375,75.5) ; U8.71@34.205,62.175 35.917,62.175 36.617,62.875 v1(37.675,62.875)
  Bottom Layer w0.254: v1(23.375,75.5) 25.7,73.175 25.7,70.3 28.312,67.688 32.144,67.688 36.956,62.875 v1(37.675,62.875)
USB_EN: R21.1 U8.68 | length 56.5
  Top Layer w0.254: v1(9.275,96.25) 21.575,83.95 v1(21.575,74.85) ; U8.68@34.205,60.675 37.85,60.675 v1(38.475,61.3)
  Bottom Layer w0.254: R21.1@7.475,96.4 7.625,96.25 v1(9.275,96.25) ; v1(21.575,74.85) 21.575,73.141 33.518,61.198 38.373,61.198 v1(38.475,61.3)
V_24pwr: C2.1 DD1.1 DD2.9 J1.2 J1.4 J1.6 J2.2 J7.4 OK1.4 OK2.4 OK3.4 R2.2 | length 321.7
  Top Layer w0.5: OK1.4@73.385,75.62 73.355,75.65 71.6,75.65 70.975,76.275 70.975,81.275 ; OK2.4@73.385,81.345 71.045,81.345 70.975,81.275 ; J1.2@101.765,97.575 101.554,97.364 101.554,75.679 J2.2@101.25,75.375 98.87,77.755 DD2.9@85.475,77.755 85.43,77.8 83.425,77.8 83.125,78.1 83.125,88.232 82.832,88.525 77.075,88.525 75.495,86.945 OK3.4@73.385,86.945 72.725,86.945 70.975,85.195 70.975,81.275
  Top Layer w1: R2.2@2.225,33.9 2.225,12.15 12.14,2.235 20.726,2.235 ; J7.4@20.61,3.935 20.726,3.819 20.726,2.235 ; DD1.1@91.55,53.75 91.55,54 91.575,54.025 94.239,54.025 94.825,54.611 94.825,64.65 88.825,70.65 87.775,70.65 C2.1@87.575,70.85 87.6,70.875 87.6,72.925 90.05,75.375 J2.2@101.25,75.375 104.025,72.6 104.025,8.225 102.625,6.825 99.45,6.825 97.925,5.3 97.925,3.35 96.175,1.6 21.361,1.6 20.726,2.235
pads on no net: D1.4 D1.6 DD2.4 DD2.5 DD2.6 DD2.7 DD2.10 DD2.11 DD2.12 DD2.13 ISO1.3 ISO1.14 J3.6 J4. J5. U2.5 U3.13 U3.14 U3.15 U8.1 U8.2 U8.10 U8.11 U8.19 U8.27 U8.43 U8.60 U8.62 U8.73 U8.97 U8.98 X1.0 X1.1 XP2.1 XP3.1

## Polygon pours and split planes (outlines as drawn)
no net on Top Layer "+3.3" (solid, pour order 1): 25.625,112.5
+3.3v on Top Layer "NONET_L-01_P-001" (solid, remove dead copper, pour order 0): 18.95,65.875 34.2,65.875 34.2,50.4 18.9,50.4 18.875,50.425
GND_ISO on Bottom Layer "GND_ISO" (solid, pour order 2): 25.375,112.5 25.425,112.45 25.425,97.9 32.275,97.9 32.775,97.4 32.775,93.925 34.975,93.925 39,89.9 66.775,89.9 66.775,93.175 67.825,94.225 82.275,94.225 84.5,92 89.025,92 94.625,97.6 94.625,112.55

## Silkscreen, mask and mechanical layers (free items; w line width, h text height)
Top Overlay:
  text "Steper mod" at 59.679,3.987 h1.52
Board:
  the board outline again, w0.2